# EAGLE board resistor-board (EAGLE 6.4)
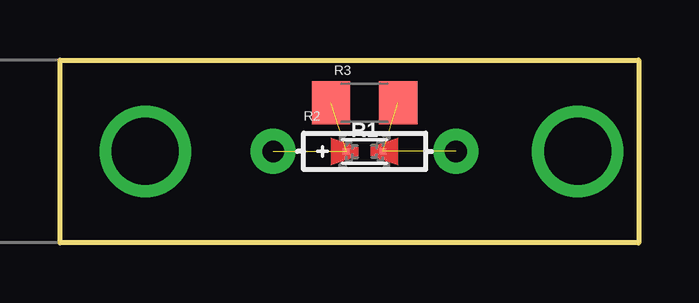
[diagram p0: board, top side]

Size 24.13 x 7.62 mm. Coordinates in mm from the lower left corner, seen from the top.
Outline: 0,0 0,7.62 24.13,7.62 24.13,0 0,0
Copper layers (1*16): Top 0.035mm / dielectric 1.5mm / Bottom 0.035mm
Design rules "default": minimum track width 10mil, minimum drill 0.6mm, track to track 8mil, track to pad 8mil, pad to pad 8mil, via to via 8mil, smd to smd 8mil, copper to edge 40mil, drill to drill 8mil, minimum pad ring 10mil, minimum via ring 8mil, stop-mask expansion 4mil, vias tented up to drill 0mil, thermal gap 10mil

## Footprints (pad centres in the part's own frame; a part is rotated, then mirrored left to right if it is on the bottom)
0402-0603-0805-UNIVERSAL = smd 0.254 x 0.254: + -0.762,0; - 0.762,0
AXIAL-0.3 = drill 0.9 pad 1.88: P$1 -3.81,0; P$2 3.81,0
1206 = smd 1.6 x 1.8: 1 -1.4,0; 2 1.4,0

## Placement (x,y rotation side)
R1  [0402-0603-0805-UNIVERSAL]  12.7,3.81 0 top
R2  [AXIAL-0.3]  12.7,3.81 0 top
R3  [1206]  12.7,5.84 0 top

## Library data of the parts
R1-R3 = tekdemo

## Nets
N$1: R1.- R2.P$2 R3.2
N$2: R1.+ R2.P$1 R3.1

## Tracks (layer width: path | path; a pad name or v marks a point on that pad's centre or on a via)
N$1  (2 unrouted)
N$2  (2 unrouted)
N$3  (via drill 2.79 pad 1.52)
  other vias: 3.56,3.81
N$4  (via drill 2.79 pad 1.52)
  other vias: 21.59,3.81